# Altium PCB BreakoutBoard.PcbDoc
Units mm, origin at the board's own origin, x right, y up, seen from the top; angles counter-clockwise.
Board outline 35.16 x 39.24 mm, 2 copper layers (Top Layer, Bottom Layer); 13 components, 8 nets, 38 pads, 0 vias.
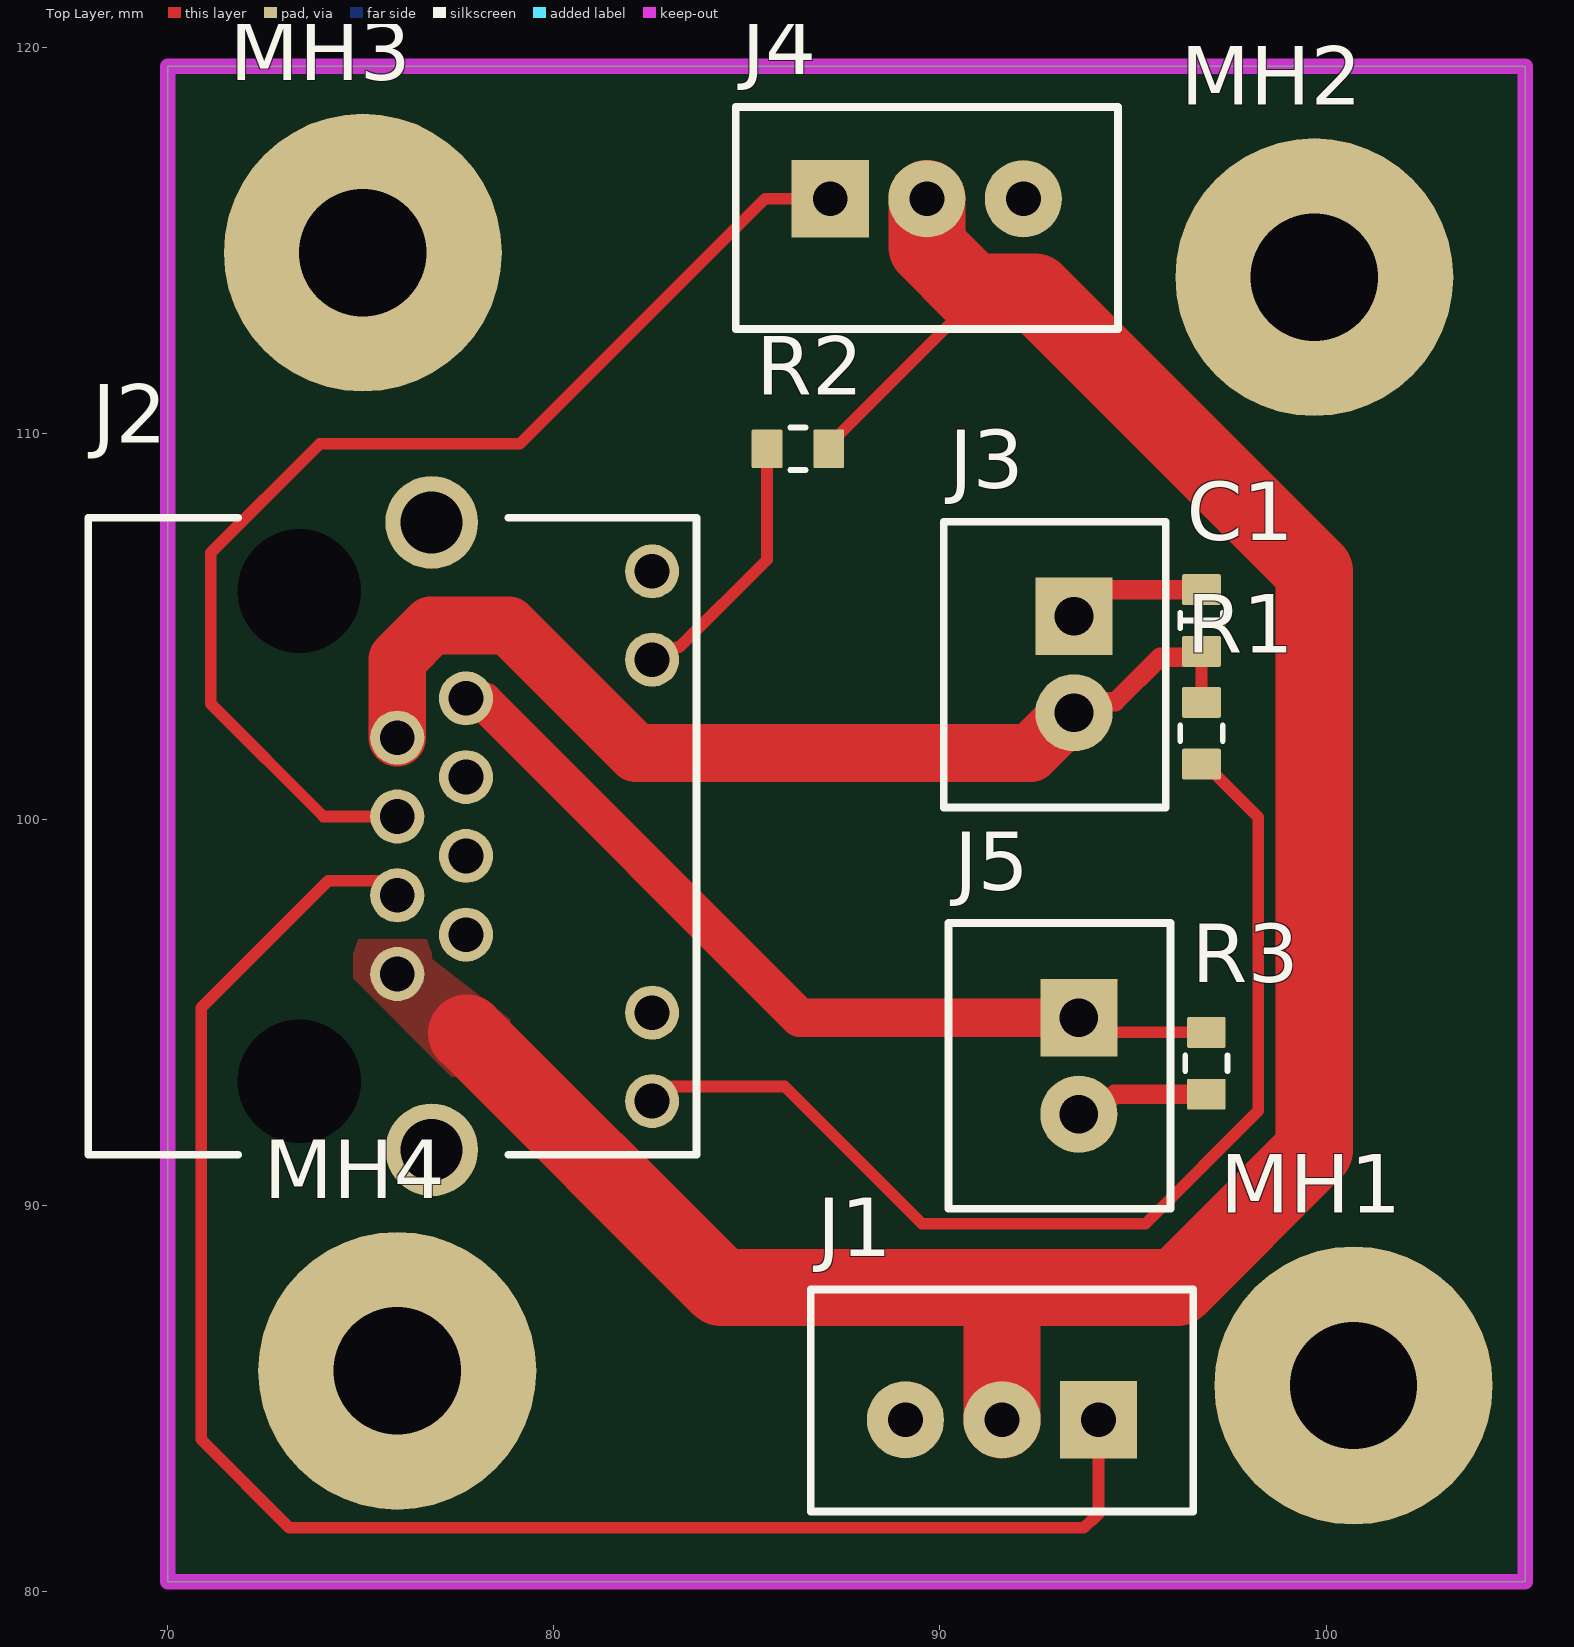
[diagram p0: Top Layer view]
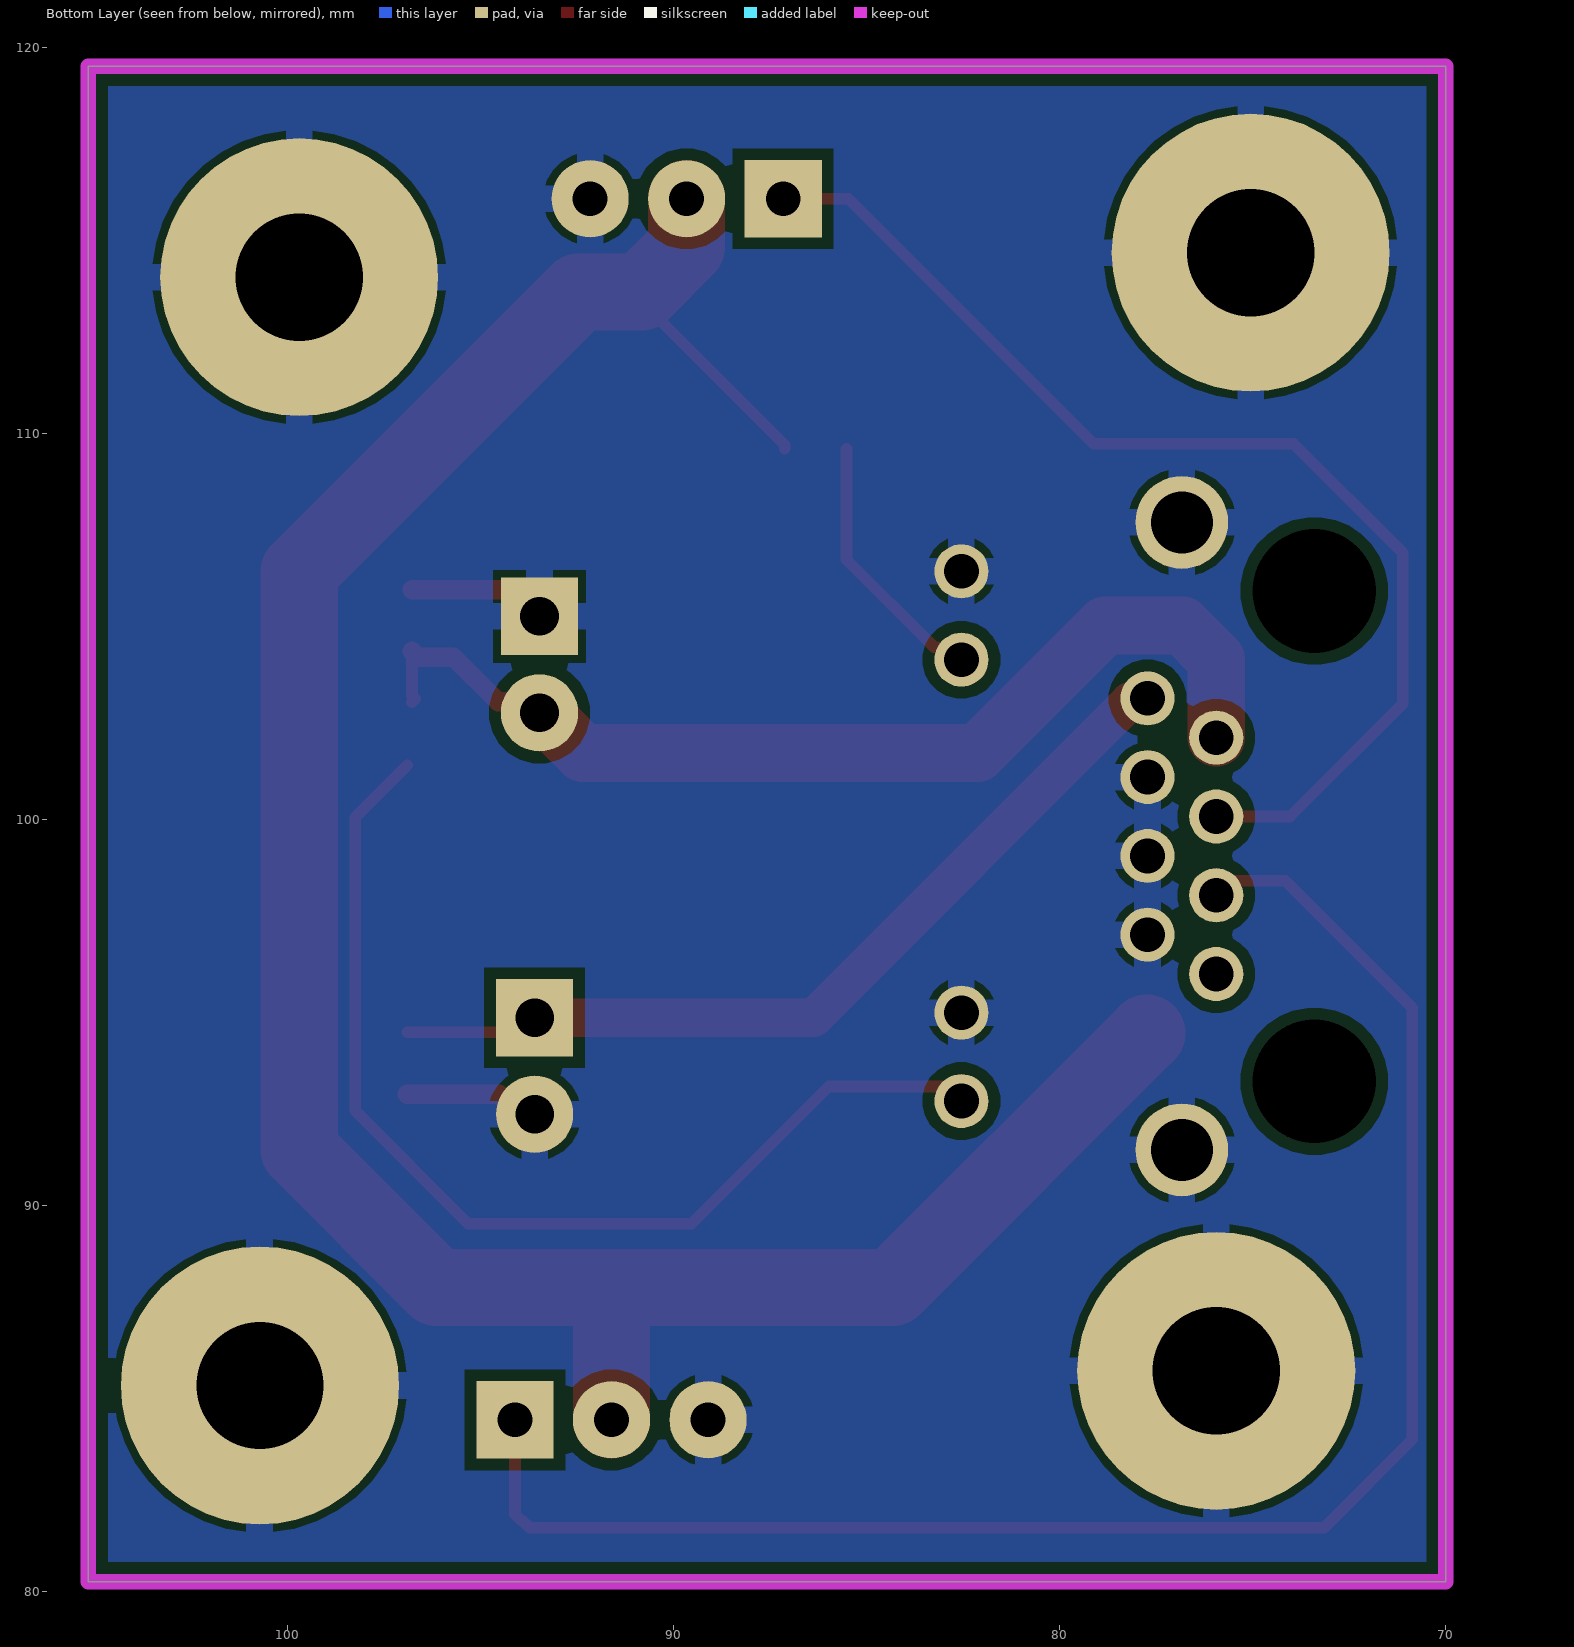
[diagram p1: Bottom Layer view, seen from below]
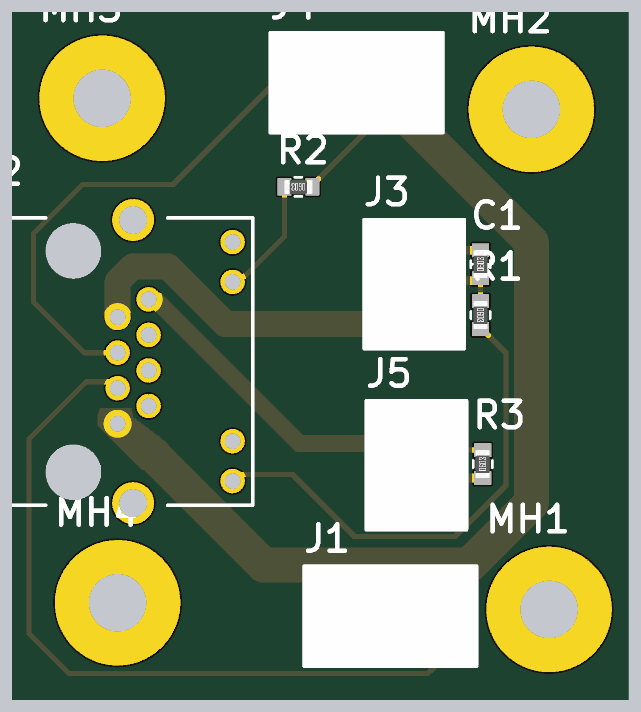
[diagram p2: 3D render of the assembled board from above, using the file's embedded part models]

## Layer stack, top to bottom
Top Solder: solder mask 0.0102, Solder Resist, Dk 3.5
Top Layer: signal copper 0.0356
Dielectric 1: dielectric 0.32, FR-4, Dk 4.8
Bottom Layer: signal copper 0.0356
Bottom Solder: solder mask 0.0102, Solder Resist, Dk 3.5

## Board outline
70,80.264 70,119.507 105.156,119.507 105.156,80.264

## Design rules (kind name [scope] priority, off if disabled: settings)
Clearance [All] p1: gap=0.3 ignorepadtopadclearanceinfootprint=FALSE
PolygonConnect [All] p1: connectstyle=Relief reliefconductorwidth=0.7 reliefentries=4 polygonreliefangle="90 Angle" airgapwidth=0.2
RoutingVias [All] p1: holewidth=0.35 width=0.7 viastyle="Through Hole" minholewidth=0.3 minwidth=0.5 maxholewidth=1 maxwidth=1.5
SolderMaskExpansion [All] p1: expansion=0.102 istentingtop=FALSE
SupplyNets "Schematic Supply Nets_1" [InNet('GND')] p1: voltage=0.000
SupplyNets "Schematic Supply Nets" [InNet('+5')] p2: voltage=0.000
Width [All] p1: maxlimit=3 minlimit=0.2 preferedwidth=0.3 minimp=50.000000 maximp=50.000000 favimp=50.000000
30 further rules are at their usual default settings.

## Components (designator, comment, footprint, x,y, rotation, side; value= is the part's Value field where it differs from the comment)
C1 "100nF" "CAP 0603" 96.774,105.156 r90 top
J1 "LiDAR_sensor" "JST XH B3B-XH-A" 91.607,84.455 r180 top
J2 "Ether_connector" MTJ88ARX1FSMLG 75.946,96 r270 top
J3 "LiDAR_Motor" "JST XH B2B-XH-A" 93.472,104.013 r270 top
J4 "Servo_connector" "JST XH B3B-XH-A" 89.662,116.078 r0 top
J5 "Magnet_connector" "JST XH B2B-XH-A" 93.599,93.619 r270 top
MH1 "M3" SCREW_M3.0 100.711,85.344 r0 top
MH2 "M3" SCREW_M3.0 99.695,114.046 r0 top
MH3 "M3" SCREW_M3.0 75.057,114.681 r0 top
MH4 "M3" SCREW_M3.0 75.946,85.725 r0 top
R1 "300R" "RES 0603" 96.774,102.235 r270 top
R2 "300R" "RES 0603" 86.322,109.601 r180 top
R3 "1K" "RES 0603" 96.901,93.688 r90 top

## Footprints (in the part's own frame and the unit in brackets; to place one, negate y for a bottom-side part, rotate by r counter-clockwise, add the part's x,y. Pads: shape width x height; smd on the part's side, far side on the other; paste and mask are expansions set on the pad)
"CAP 0603" [mm] "Chip Resistor, 2-Leads, Body 1.60x0.80mm"
  rrect10% 0.8x1 smd: 1(-0.8,0) 2(0.8,0)
  silkscreen extent -0.2,-0.55 0.2,0.55, body extent -0.8,-0.4 0.8,0.4, height 0.45
"JST XH B2B-XH-A" [mm]
  rect 2x2 hole 1: 1(-1.25,0)
  round 2 hole 1: 2(1.25,0)
  silkscreen extent -3.7,-3.38 3.7,2.38, body extent -3.7,-3.38 3.7,2.38, height 7
"JST XH B3B-XH-A" [mm]
  rect 2x2 hole 0.9: 1(-2.5,0)
  round 2 hole 0.9: 2(0,0) 3(2.5,0)
  silkscreen extent -4.95,-3.38 4.95,2.38, body extent -4.95,-3.38 4.95,2.38, height 7
MTJ88ARX1FSMLG [mm]
  round 1.4 hole 0.9: 1(0,0) 2(-1.02,1.78) 3(-2.04,0) 4(-3.06,1.78) 5(-4.08,0) 6(-5.1,1.78) 7(-6.12,0) 8(-7.14,1.78) 11(3.29,6.6) 12(1,6.6) 13(-8.14,6.6) 14(-10.43,6.6)
  round 2.4 hole 1.6: 9(-11.695,0.89) 10(4.555,0.89)
  round 1.6 hole 3.2 unplated: MH3(2.78,-2.54) MH4(-9.92,-2.54)
  silkscreen extent -11.82,-8 4.68,7.75
"RES 0603" [mm] "Chip Resistor, 2-Leads, Body 1.60x0.80mm"
  rrect10% 0.8x1 smd: 1(-0.8,0) 2(0.8,0)
  silkscreen extent -0.2,-0.55 0.2,0.55, body extent -0.8,-0.4 0.8,0.4, height 0.45
SCREW_M3.0 [mm] "M3 Screw Close FIt"
  round 7.2 hole 3.301: 1(0,0)

## Part data
C1: library part Capacitor, "SMT Capacitor"
MH1 MH2 MH3 MH4: library part SCREW
R1 R2 R3: library part Res, "Resistor", Ordered by=Subcon, Published=8-Jun-2000, Publisher="Altium Limited", Revision="July-2002: Re-released for DXP Platform."

## Nets (pads, with @x,y where several pads share a name; then routed paths per layer and width w, separated by ;. In a path a pad name is that pad's centre, name@x,y a point inside that pad or via, vN(x,y) a via of type N, cw(c..) or ccw(c..) an arc to the next point about the centre after c; other vN are vias at no path point)
+5: J1.2 J2.1 J4.2 R2.1 | length 64.3
  Top Layer w0.3: R2.1 87.122,109.701 90.324,112.903 90.834,112.903
  Top Layer w2: 77.746,94.466 84.328,87.884 91.607,87.884 96.139,87.884 99.695,91.44 99.695,106.426 92.456,113.665 90.834,113.665 89.662,114.837 J4.2 ; J1.2 91.607,87.684
GND: C1.2 J1.3 J2.2 J2.4 J2.6 J2.9 J2.10 J2.12 J2.14 J3.1 J4.3 J5.2 MH1.1 MH2.1 MH3.1 MH4.1 R3.1 | length 7.7
  Top Layer w0.3: J4.3@92.011,115.927 J4.3 J4.3@92.162,115.707
  Top Layer w0.5: J3.1 94.165,105.956 C1.2 ; J5.2 94.005,92.369 94.524,92.888 R3.1
LidTX: J1.1 J2.3 | length 44.4
  Top Layer w0.3: J2.3@75.946,98.417 74.16,98.417 70.866,95.123 70.866,83.947 73.152,81.661 93.726,81.661 93.902,81.837 93.931,81.837 94.107,82.012 J1.1
Mag/LED+: J2.8 J5.1 R3.2 | length 22.8
  Top Layer w0.3: J5.1 93.98,94.488 R3.2
  Top Layer w1: J2.8@77.803,103.325 77.803,103.172 77.911,103.063 78.18,103.063 86.374,94.869 J5.1
Motor+: C1.1 J2.7 J3.2 R1.1 | length 27.1
  Top Layer w0.3: R1.1 96.685,103.124 96.774,103.213 C1.1
  Top Layer w0.5: J3.2 93.759,103.05 94.541,103.05 95.697,104.206 96.624,104.206 C1.1
  Top Layer w1.5: J2.7 75.946,104.15 76.825,105.029 78.825,105.029 82.127,101.727 92.343,101.727 93.379,102.763 J3.2
NetJ2_11: J2.11 R1.2 | length 28
  Top Layer w0.3: J2.11@82.656,93.197 82.546,93.087 82.656,93.087 85.983,93.087 89.535,89.535 95.324,89.535 98.245,92.456 98.245,100.064 R1.2@96.901,101.408
NetJ2_13: J2.13 R2.2 | length 6.9
  Top Layer w0.3: J2.13 82.844,104.14 83.164,104.461 83.252,104.461 85.522,106.731 R2.2
SrvoCntrl: J2.5 J4.1 | length 29.8
  Top Layer w0.3: J2.5 74.037,100.08 71.12,102.997 71.12,106.91 73.938,109.728 79.121,109.728 85.471,116.078 J4.1
pads on no net: J2.MH3 J2.MH4

## Polygon pours and split planes (outlines as drawn)
GND on Bottom Layer "GND_L02_P000" (solid, remove dead copper, pour order 0): 64.262,124.46 64.389,124.587 144.399,124.587 144.399,75.819 144.526,75.692 144.399,75.565 65.913,75.565
+5 on Top Layer "+5_L01_P001" (solid, pour order 1): 74.803,96.52 74.93,96.901 76.708,96.901 76.835,96.774 76.835,96.393 78.994,94.742 77.597,93.345 77.343,93.345 74.803,95.885

## Keep-outs
Keep-Out Layer:
  the board outline again, w0.4

## Silkscreen, mask and mechanical layers (free items; w line width, h text height)
Board:
  the board outline again, w0.254